# EAGLE board Curret_Detector (EAGLE 8.5.1)

Size 30.15 x 43.17 mm. Coordinates in mm from the lower left corner, seen from the top.
Outline: 0,0 30.15,0 30.15,43.17 0,43.17 0,0
Copper layers (1*16): Top 0.035mm / dielectric 1.5mm / Bottom 0.035mm
Design rules "default": minimum track width 6mil, minimum drill 0.35mm, track to track 6mil, track to pad 6mil, pad to pad 6mil, via to via 6mil, smd to smd 6mil, copper to edge 40mil, drill to drill 6mil, minimum pad ring 10mil, minimum via ring 8mil, stop-mask expansion 4mil, vias tented up to drill 0mil, thermal gap 10mil

## Footprints (pad centres in the part's own frame; a part is rotated, then mirrored left to right if it is on the bottom)
E2,5-7 = drill 0.813 pad 1.6: + -1.27,0 | drill 0.813 pad 1.6 octagon: - 1.27,0
C050-035X075 = drill 0.813 octagon: 1 -2.54,0; 2 2.54,0
DO41-10 = drill 1.118 pad 1.93: A 5.08,0; C -5.08,0
DIL04 = drill 0.813 long: 1 -1.27,-3.81; 2 1.27,-3.81; 3 1.27,3.81; 4 -1.27,3.81
0207/10 = drill 0.813 octagon: 1 -5.08,0; 2 5.08,0

## Placement (x,y rotation side)
C1  10uF  [E2,5-7]  24.13,5.08 180 top
C2  100nF  [C050-035X075]  25.4,26.67 90 top
D1  1N4004  [DO41-10]  7.62,35.56 270 top
D2  1N4004  [DO41-10]  7.62,21.59 270 top
D3  1N4004  [DO41-10]  7.62,7.62 270 top
D4  1N4004  [DO41-10]  3.81,7.62 90 top
D5  1N4004  [DO41-10]  3.81,21.59 90 top
D6  1N4004  [DO41-10]  3.81,35.56 90 top
D7  1N4004  [DO41-10]  25.4,15.24 90 top
D8  1N4004  [DO41-10]  21.59,15.24 90 top
OK1  PC817  [DIL04]  16.51,25.4 270 top
R1  1k  [0207/10]  11.43,35.56 90 top
R2  1k  [0207/10]  20.32,35.56 90 top

## Library data of the parts
C1 C2 = rcl; SPICEPREFIX: C
D1-D8 = adafruit
OK1 = optocoupler-2
R1 R2 = rcl

## Nets
5V: R2.2
GND: C1.- D8.A OK1.3
L: D1.C D6.A R1.2
LOAD: D3.A D4.C OK1.2
N$1: D2.A D3.C
N$2: D1.A D2.C
N$3: C2.2 OK1.4 R2.1
N$4: C2.1 D7.A D8.C
N$5: D5.A D6.C
N$6: D4.A D5.C
N$9: OK1.1 R1.1
SIGNAL: C1.+ D7.C

## Tracks (layer width: path | path; a pad name or v marks a point on that pad's centre or on a via)
GND  (2 unrouted)
L  (2 unrouted)
LOAD  (2 unrouted)
N$1  (1 unrouted)
N$2  (1 unrouted)
N$3  (2 unrouted)
N$4  (2 unrouted)
N$5  (1 unrouted)
N$6  (1 unrouted)
N$9  (1 unrouted)
SIGNAL  (1 unrouted)